# Allegro board TIDA-01606_HV_CARDE4_SCH.brd
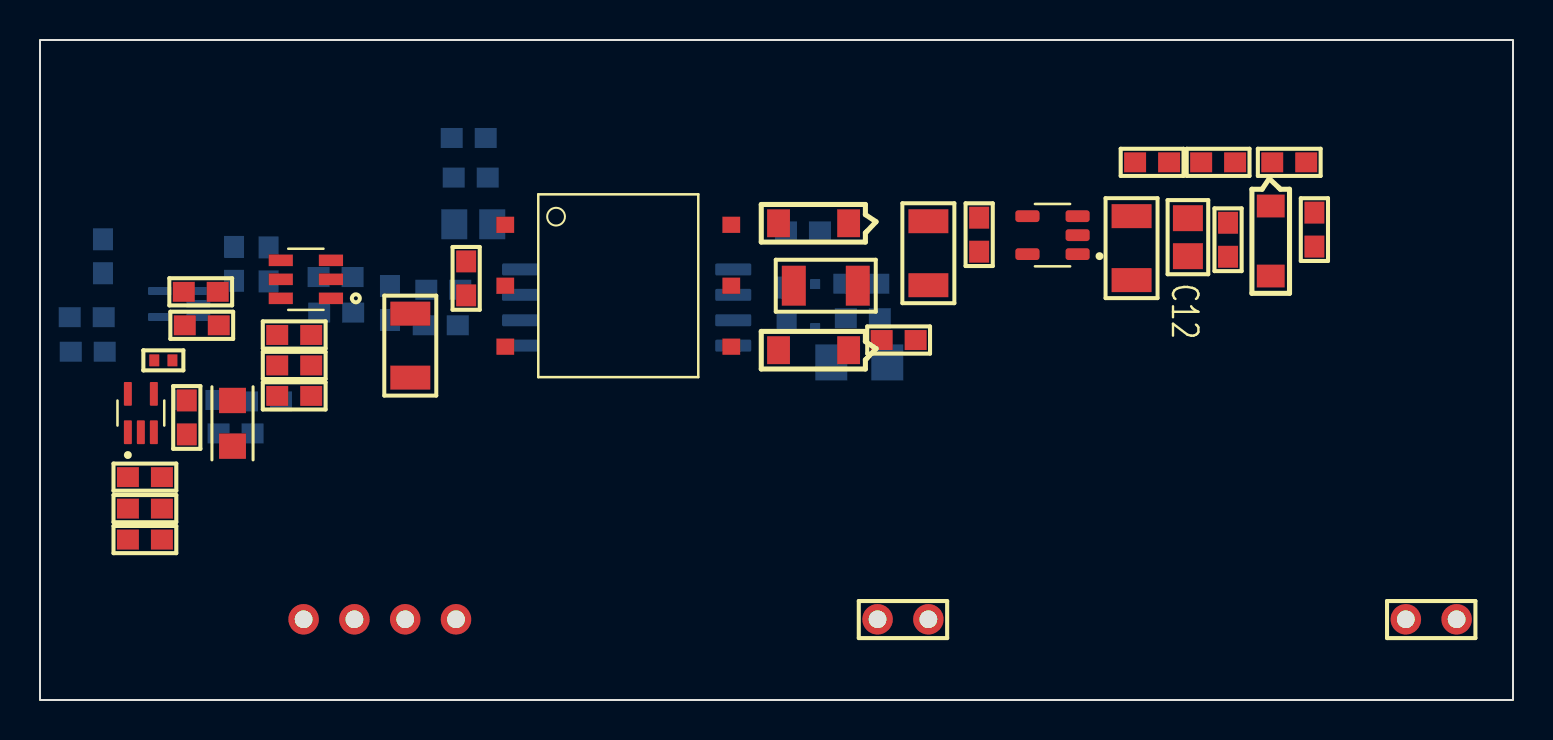
[diagram p0: board, top side]
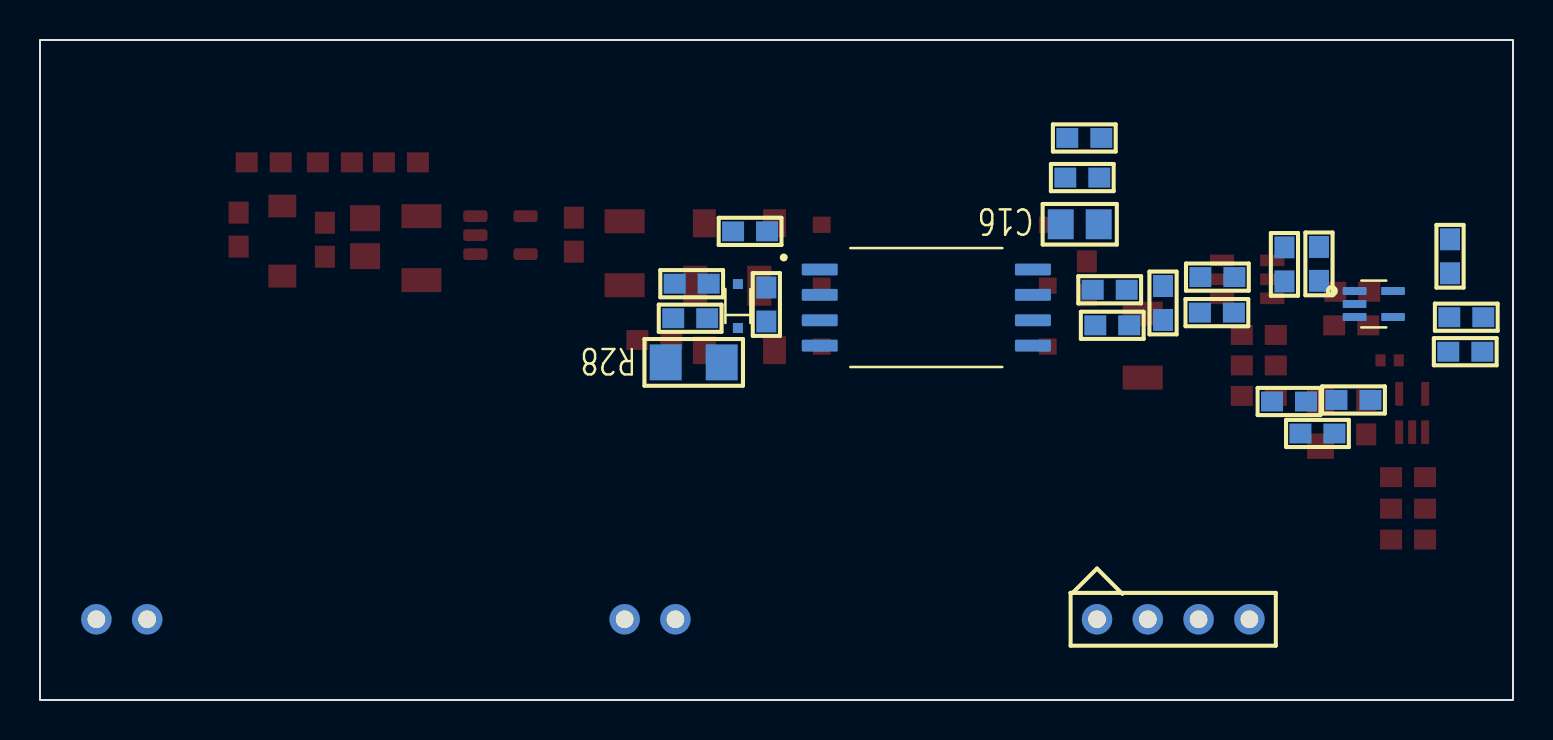
[diagram p1: board, bottom side, seen from below]

Outline 73.66 x 33.02 mm; copper layers: TOP, BOTTOM. Coordinates in mm from the lower left corner of the outline.
Outline path: rectangle 0,0 73.66,33.02

## Design rules (mm)
constraint set DEFAULT: min track width 0.127

## Placement (name value [footprint] x y rotation side)
C1  Ele 10u 10V 105C  [TAJA_AVX]  9.63 13.84 270 top
C2  0.1u 0603 50V  [RES0603]  7.34 14.14 270 top
C3  10u 1210 50V  [SNPD1210_MODIFIED]  18.52 17.73 270 top
C4  0.1uF 0603 50V  [RES0603]  12.71 16.74 180 top
C5  0.1u 0603 50V  [RES0603]  5.25 9.58 180 top
C6  0.1u 0603 50V  [RES0603]  21.31 21.09 90 top
C7  10u 1210 50V  [SNPD1210_MODIFIED]  39.29 20.73 180 top
C8  0.1u 0603 50V  [RES0603]  42.94 18.01 0 top
C9  0.1u 0603 50V  [RES0603]  46.96 23.28 270 top
C10  10u 1210 50V  [SNPD1210_MODIFIED]  44.42 22.35 270 top
C11  0.1u 1206 50V  [RES0603]  59.41 23.03 270 top
C12  10u 1210 50V  [SNPD0805_MODIFIED]  57.4 23.15 270 top
C13  0.1u 1206 50V  [SNPD1210_MODIFIED]  54.58 22.61 270 top
C14  0.01u 0603 50V  [RES0603]  9.78 13.34 180 bottom
C15  0.1u 0603 50V  [RES0603]  38.15 23.44 180 bottom
C16  0.1u 1206 50V  [SNPD0805_MODIFIED]  21.67 23.8 0 bottom
C17  0.1u 1206 50V  [RES0603]  21.54 26.14 0 bottom
C18  0.1u 0603 50V  [RES0603]  3.15 22.2 270 bottom
C19  0.01u 0603 16V  [RES0603]  37.34 19.79 270 bottom
C20  0.01u 0603 16V  [RES0603]  17.5 19.86 90 bottom
C21  0.1u 0603 50V  [RES0603]  2.39 17.42 0 bottom
C22  0.01u 0603 16V  [RES0603]  11.43 21.79 270 bottom
D1  B0520LW-7-F 20V  [SOD123]  40.44 23.85 180 top
D2  B0520LW-7-F 20V  [SOD123]  40.44 17.5 180 top
D3  150060VS55040 Green  [RES0603]  63.73 23.53 90 top
D4  Zener 5.6V  [SOD123]  61.54 24.71 270 top
D5  CDSOD323-T03SC  [SOD323F]  38.76 19.71 270 bottom
DC+1  PBC02SGBN  [SIP_2PIN_BERGSTRIP]  70.84 4.04 270 top
DC-1  PBC02SGBN  [SIP_2PIN_BERGSTRIP]  44.42 4.04 270 top
J1  61300411021  [SIP4_RUP]  20.8 4.04 90 bottom
L1  742792662  [RES0603]  55.61 26.9 180 top
L2  74279228260  [RES0603]  21.44 28.12 0 bottom
R1  0E 0603 1%  [RES0603]  12.71 15.21 0 top
R2  56K 0603 5%  [RES0603]  5.25 11.15 0 top
R3  47K 0603 5%  [RES0603]  8.09 18.75 180 top
R5  56K 0603 5%  [RES0603]  5.25 8.03 180 top
R6  56K 0402 5%  [RES0402]  6.17 16.99 180 top
R7  0E 0603 1%  [RES0603]  12.71 18.26 180 top
R8  47K 0603 5%  [RES0603]  8.04 20.42 0 top
R9  0E 0603 5%  [RES0603]  58.91 26.9 180 top
R10  330E 0603 5%  [RES0603]  62.47 26.9 180 top
R17  0E 0603 5%  [RES0603]  11.2 14.94 180 bottom
R18  7.50K 0603 1%  [RES0603]  7.98 15.01 180 bottom
R19  39E 0603 5%  [RES0603]  41.07 20.83 180 bottom
R20  4.70K 0603 1%  [RES0603]  20.04 18.75 180 bottom
R21  4.70K 0603 1%  [RES0603]  14.81 19.38 180 bottom
R23  100E 0603 1%  [RES0603]  2.34 19.15 180 bottom
R24  4.70K 0603 1%  [RES0603]  20.17 20.52 180 bottom
R25  4.70K 0603 1%  [RES0603]  14.78 21.16 180 bottom
R27  39E 0603 5%  [RES0603]  41.15 19.1 180 bottom
R28  31.6K 0603 1%  [SNPD1206_MODIFIED]  40.97 16.89 0 bottom
R29  15K 0603 1%  [RES0603]  9.7 21.82 90 bottom
T1  750343804  [TOROID_SMD_6PIN_1123]  28.92 20.73 0 top
U1  TI-TPS22944DCK5  [SOT65P210X110-5N]  5.04 14.36 90 top
U2  SN6505  [SOT95P280X145-6N]  13.29 21.05 180 top
U3  TLV70433DBVT  [SOT95P280X145-5N]  50.63 23.26 180 top
U4  AMC1311DWVR  [SOIC127P1150X280-8N]  29.34 19.63 180 bottom
U5  AMC1311DWVR  [SOT65P210X110-5N]  6.96 19.81 180 bottom

## Library data of the parts
C1 = CAP: User Part Number: PN; Tolerance: TOL; room: 24Vcc3_smps
C2-C22 = CAP NP: room: control_smps
D1 D2 D4 = DIODE ZENER: room: control_smps
D3 = LED: room: lcd_led_pic
D5 = DIODE TVS BI-DIR
DC+1 DC-1 = CON2: room: InputPowe_smps
J1 = HEADER 4_0
L1 L2 = RESISTOR_0: room: control_smps
R1-R3 R5-R10 R17-R21 R23-R25 R27-R29 = RESISTOR: room: control_smps
T1 = TRANSFORMER STEPUP_0
U1 = DM3AT-SF-PEJM5_0
U2 = DM3AT-SF-PEJM5_1
U3 = DM3AT-SF-PEJM5_2
U4 = DM3AT-SF-PEJM5_3
U5 = DM3AT-SF-PEJM5_4

## Footprints (pads in the part's own frame, mm; a bottom-side part is the same pattern mirrored in y, then rotated)
RES0402
  rect 0.5x0.6 smd: 1(-0.455,0) 2(0.455,0)
RES0603
  rect 1.1x1 smd: 1(-0.85,0) 2(0.85,0)
SIP4_RUP
  round 1.524 hole 0.889: 1(0,0) 2(0,-2.54) 3(0,-5.08) 4(0,-7.62)
SIP_2PIN_BERGSTRIP
  round 1.524 hole 0.889: 1(0,0) 2(0,-2.54)
SNPD0805_MODIFIED
  rect 1.3x1.5 smd: 1(-0.95,0) 2(0.95,0)
SNPD1206_MODIFIED
  rect 1.6x1.8 smd: 1(-1.4,0) 2(1.4,0)
SNPD1210_MODIFIED
  rect 1.2x2 smd: 1(-1.6,0) 2(1.6,0)
SOD123
  rect 1.143x1.397 smd: 1(0,0) 2(3.505,0)
SOD323F
  rect 0.5x0.5 smd: 1(1.1,0) 2(-1.1,0)
SOIC127P1150X280-8N
  custom 1.8x0.6 smd: 1(-5.33,1.905) 2(-5.33,0.635) 3(-5.33,-0.635) 4(-5.33,-1.905) 5(5.33,-1.905) 6(5.33,-0.635) 7(5.33,0.635) 8(5.33,1.905)
SOT65P210X110-5N
  custom 1.19x0.4 smd: 1(-0.96,0.65) 2(-0.96,0) 3(-0.96,-0.65) 4(0.96,-0.65) 5(0.96,0.65)
SOT95P280X145-5N
  custom 1.21x0.59 smd: 1(-1.255,0.95) 2(-1.255,0) 3(-1.255,-0.95) 4(1.255,-0.95) 5(1.255,0.95)
SOT95P280X145-6N
  rect 1.21x0.58 smd: 1(-1.255,0.95) 2(-1.255,0) 3(-1.255,-0.95) 4(1.255,-0.95) 5(1.255,0) 6(1.255,0.95)
TAJA_AVX
  rect 1.269x1.346 smd: 1(-1.143,0) 2(1.143,0)
TOROID_SMD_6PIN_1123
  rect 0.889x0.813 smd: 1(-5.652,3.048) 2(-5.652,0) 3(-5.652,-3.048) 4(5.652,-3.048) 5(5.652,0) 6(5.652,3.048)

## Nets
3.3V: C1.1 C2.1 J1.3 R3.1 U1.5
3.3V_ISO: C15.2 D4.1(CATHODE) R9.1 R10.2 R28.1 U4.1
3.3V_LS: C5.1 C18.1 L2.1 R2.2 R5.1 U5.5
5V: J1.1 R1.1
6V: C7.1 C8.1 C9.1 C10.1 D1.1(CATHODE) D2.1(CATHODE) U3.2
0: C1.2 C2.2 C3.2 C4.2 C5.2 C6.2 C7.2 C8.2 C9.2 C10.2 C11.2 C12.2 C13.2 C15.1 C16.1 C17.1 C18.2 C21.2 C22.2 D3.1(CATHODE) D4.2 J1.4 R5.2 R8.2 R29.1 T1.5(NC2) U1.2 U2.4 U2.6 U3.1 U4.4 U4.5 U5.2(V-)
DC+: DC+1.1 DC+1.2
DC-: DC-1.1 DC-1.2
VDC_SEN: C21.1 J1.2 R23.2
N14282127: R2.1 U1.1(VOUT)
N14282426: R6.2 U1.4
N14282456: R3.2 R6.1 R8.1
N14283151: C3.1 C4.1 C6.1 R1.2 R7.1 T1.2 U2.2(VCC)
N14283155: R7.2 U2.5
N14283577: T1.1 U2.3
N14283744: T1.3 U2.1
N14285027: D1.2 T1.6
N14285036: D2.2 T1.4
N14286486: C13.1 L1.2 U3.3(OUT)
N14286527: C11.1 C12.1 L1.1 R9.2
N14287197: D3.2 R10.1
N14288330: R19.1
N14288334: C19.1 D5.2 R19.2 U4.2
N14288391: R27.1 R28.2
N14288393: C19.2 D5.1 R27.2 U4.3
N14290058: C20.1 R20.2 R21.1
N14290074: C20.2 R24.2 R25.1
N14290818: C22.1 R25.2 R29.2
N14291266: R20.1 U4.6
N14291397: R24.1 U4.7(VOUTP)
N14291912: C16.2 C17.2 L2.2 U4.8
N14293246: C14.1 R17.1 U5.3
N14293263: R21.2 U5.1
N14294698: C14.2 R18.2 R23.1 U5.4
N142946331: R17.2 R18.1

Pads without a net: U1 3; U3 4 5
